# Altium PCB robotShield.PcbDoc
Units mm, origin at the board's own origin, x right, y up, seen from the top; angles counter-clockwise.
Board outline 76.26 x 60.13 mm, 2 copper layers (Top Layer, Bottom Layer); 85 components, 59 nets, 312 pads, 62 vias.
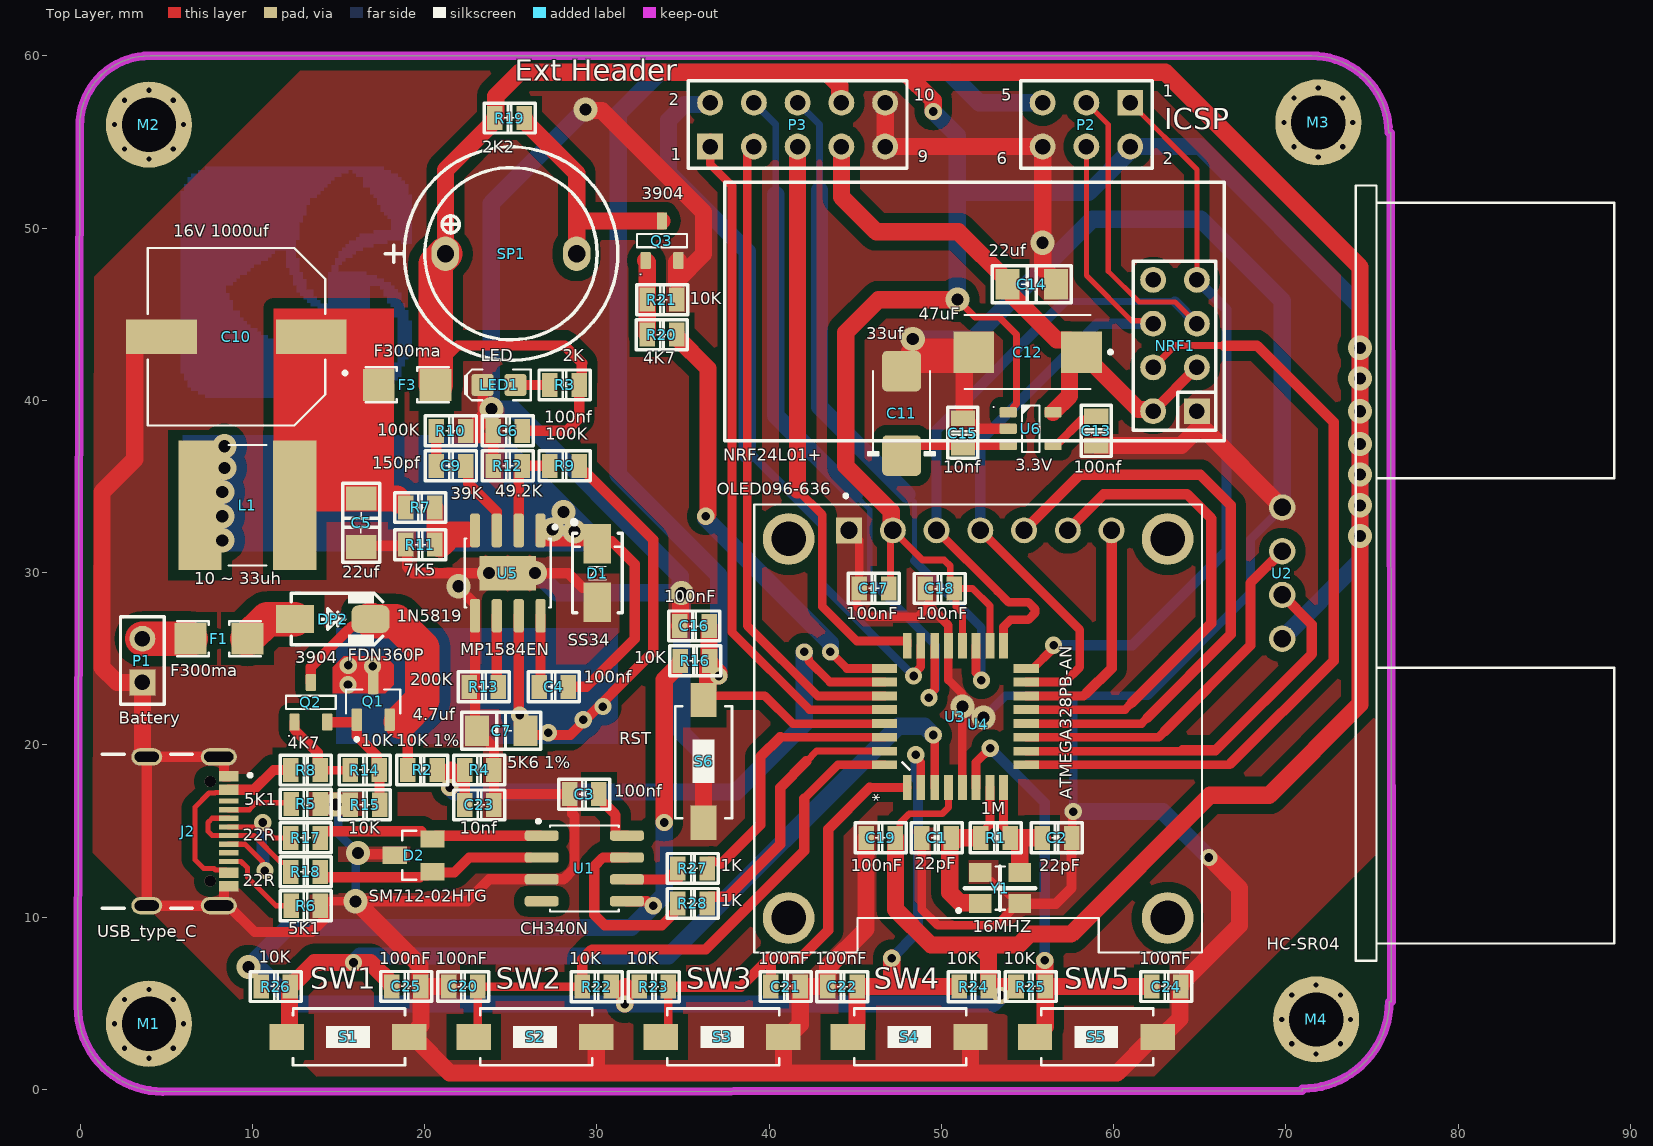
[diagram p0: Top Layer view]
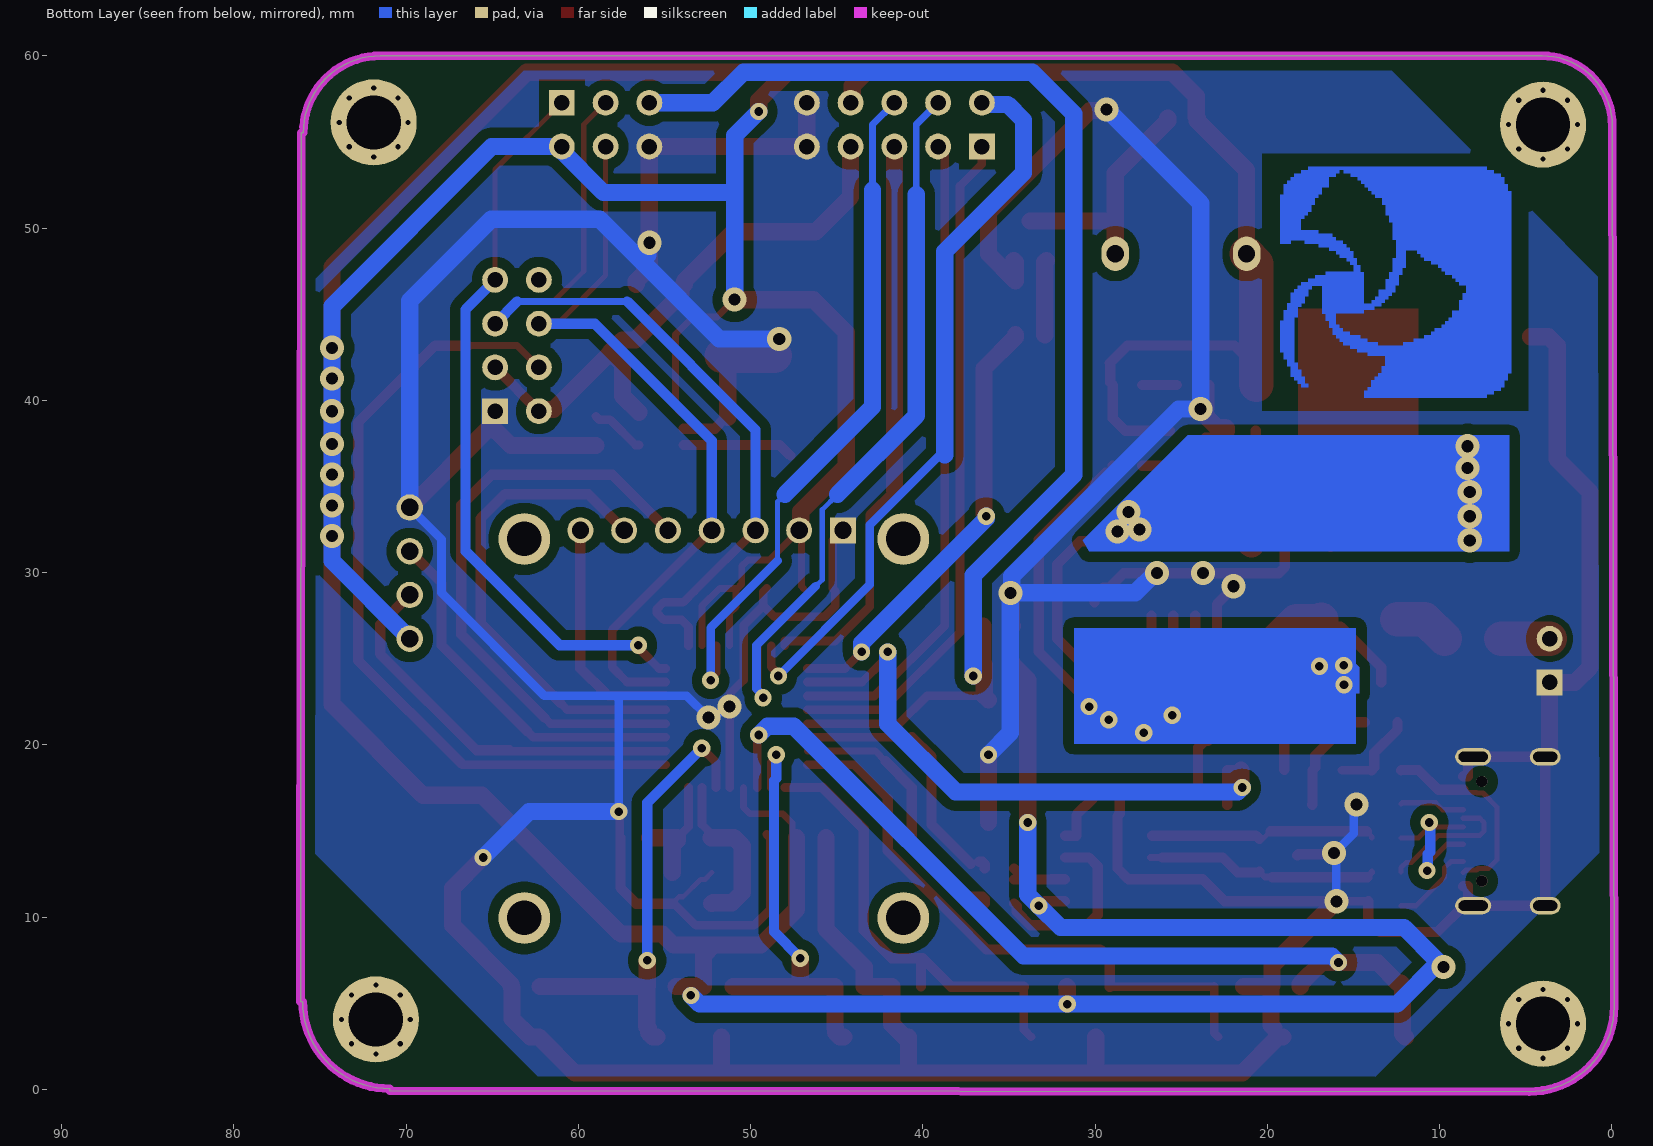
[diagram p1: Bottom Layer view, seen from below]

## Layer stack, top to bottom
Top Solder: solder mask 0.0102, Solder Resist, Dk 3.5
Top Layer: signal copper 0.0356
Dielectric 1: dielectric 0.32, FR-4, Dk 4.8
Bottom Layer: signal copper 0.0356
Bottom Solder: solder mask 0.0102, Solder Resist, Dk 3.5

## Board outline
-0.129,4.811 -0.017,55.936 cw(c4.049,55.936) 4.049,60.002 71.502,60.002 cw(c71.502,55.538) 75.966,55.538 76.093,55.538 76.127,5.101 76,5.101 cw(c70.944,5.101) 70.944,0.045 70.944,-0.082 4.806,-0.124 cw(c4.806,4.811)

## Design rules (kind name [scope] priority, off if disabled: settings)
Clearance Clearance_1 [InNamedPolygon('GND_L01_P001') Or InNamedPolygon('GND_L02_P000')] p1: gap=0.6 ignorepadtopadclearanceinfootprint=FALSE
Clearance [All] p2: gap=0.2 ignorepadtopadclearanceinfootprint=FALSE
DiffPairsRouting [All] p1: maxlimit=0.5 minlimit=0.3 mostfreqgap=0.3 toplayer_minwidth=0.3 toplayer_maxwidth=0.5 toplayer_prefwidth=0.4 bottomlayer_minwidth=0.3 bottomlayer_maxwidth=0.5 bottomlayer_prefwidth=0.4 maxuncoupledlength=12.7
PolygonConnect PolygonConnect_1 [All vs IsNamedPolygon('GND_L01_P001') Or IsNamedPolygon('GND_L02_P000')] p1: connectstyle=Direct reliefconductorwidth=0.254 reliefentries=4 polygonreliefangle="90 Angle" airgapwidth=0.254
PolygonConnect [All] p2: connectstyle=Relief reliefconductorwidth=0.254 reliefentries=4 polygonreliefangle="90 Angle" airgapwidth=0.254
RoutingVias [All] p1: holewidth=0.7 width=1.2 viastyle="Through Hole" minholewidth=0.5 minwidth=1 maxholewidth=2 maxwidth=1.5
SolderMaskExpansion [All] p1: expansion=0.102 istentingtop=FALSE
Width [All] p1: maxlimit=2 minlimit=0.2 preferedwidth=0.4
29 further rules are at their usual default settings.

## Classes and differential pairs
component class Designator: C4 C5 C6 C7 C9 C10 C11 C12 C13 C14 C15 C23 D1 D2 DP2 F1 F2 F3 J2 L1 LED1 M1 M2 M3 M4 P1 Q1 Q2 R2 R3 R4 R5 R6 R7 R8 R9 R10 R11 R12 R13 R14 R15 R17 R18 U5 U6
component class MainPlanSchDoc: C1 C2 C3 C16 C17 C18 C19 C20 C21 C22 C24 C25 NRF1 P2 P3 Q3 R1 R16 R19 R20 R21 R22 R23 R24 R25 R26 R27 R28 S1 S2 S3 S4 S5 S6 SP1 U1 U2 U3 U4 Y1
differential pair USBD: +USBD_P -USBD_N

## Components (designator, comment, footprint, x,y, rotation, side; value= is the part's Value field where it differs from the comment)
C1 "22pF" C0805 49.721,14.607 r0 top
C2 "22pF" C0805 56.706,14.607 r180 top
C3 "100nf" C0805 29.274,17.147 r180 top
C4 "100nf" C0805 27.496,23.37 r180 top
C5 "22uf" C1206 16.32,32.895 r90 top
C6 "100nf" C0805 24.829,38.229 r0 top
C7 "4.7uf" C1206 24.448,20.83 r180 top
C9 "150pf" C0805 21.527,36.197 r0 top
C10 "16V 1000uf" CAP_SMD13*13 9.081,43.69 r180 top
C11 "33uf" CAPMP6032X280N 47.689,39.245 r90 top value=33µ
C12 "47uF" CAPMP7343X430N 55.005,42.801 r180 top
C13 "100nf" C0805 58.992,38.229 r270 top
C14 "22uf" C1206 55.245,46.736 r0 top
C15 "10nf" C0805 51.245,38.102 r90 top
C16 "100nF" C0805 35.662,26.907 r180 top
C17 "100nF" C0805 46.084,29.089 r180 top
C18 "100nF" C0805 49.911,29.083 r180 top
C19 "100nF" C0805 46.482,14.605 r180 top
C20 "100nF" C0805 22.244,5.977 r180 top
C21 "100nF" C0805 40.958,5.971 r0 top
C22 "100nF" C0805 44.26,5.971 r180 top
C23 "10nf" C0805 23.178,16.512 r0 top
C24 "100nF" C0805 63.056,5.971 r0 top
C25 "100nF" C0805 18.942,5.977 r0 top
D1 "SS34" DIOM4629X24N 30.036,29.974 r90 top
D2 "SM712-02HTG" SOT23 19.368,13.591 r90 top
DP2 "1N5819" 430X270D 14.669,27.307 r0 top
F1 "F300ma" "1206 FUSE" 8.065,26.164 r0 top
F3 "F300ma" "1206 FUSE" 18.987,40.896 r0 top
J2 "USB_type_C" USB_type_C 3.874,14.988 r270 top
L1 "10 ~ 33uh" IND_7*7 9.716,33.911 r180 top
LED1 "LED" LED-0805-K 24.321,40.896 r180 top value=Green
M1 "Screw" "Board Screw_No Silk" 4,3.81 r0 top
M2 "Screw" "Board Screw_No Silk" 4,56.007 r0 top
M3 "Screw" "Board Screw_No Silk" 71.882,56.134 r0 top
M4 "Screw" "Board Screw_No Silk" 71.755,4.064 r0 top
NRF1 "NRF24L01+" NRF24L01P 64.834,39.372 r90 top locked
P1 "Battery" HDR1X2 3.62,23.624 r90 top
P2 "ICSP" HDR2X3 60.96,57.277 r180 top
P3 "Ext Header" HDR2X5 36.576,54.737 r0 top
Q1 "FDN360P" SOT95P251X112-3N 17.016,22.525 r90 top
Q2 "3904" SOT23-3 13.399,22.474 r90 top
Q3 "3904" SOT23-3 33.782,49.269 r90 top
R1 "1M" C0805 53.15,14.607 r0 top
R2 "10K 1%" C0805 19.876,18.544 r180 top
R3 "2K" C0805 28.131,40.896 r180 top
R4 "5K6 1%" C0805 23.178,18.544 r180 top
R5 "5K1" C0805 13.105,16.572 r180 top
R6 "5K1" C0805 13.105,10.664 r180 top
R7 "39K" C0805 19.749,33.784 r180 top
R8 "4K7" C0805 13.093,18.538 r0 top
R9 "100K" C0805 28.131,36.197 r180 top
R10 "100K" C0805 21.527,38.229 r0 top
R11 "7K5" C0805 19.749,31.625 r0 top
R12 "49.2K" C0805 24.829,36.197 r0 top
R13 "200K" C0805 23.432,23.37 r0 top
R14 "10K" C0805 16.522,18.538 r0 top
R15 "10K" C0805 16.545,16.529 r180 top
R16 "10K" C0805 35.701,24.875 r0 top
R17 "22R" C0805 13.093,14.6 r0 top
R18 "22R" C0805 13.093,12.631 r0 top
R19 "2K2" C0805 24.931,56.388 r0 top
R20 "4K7" C0805 33.782,43.815 r180 top
R21 "10K" C0805 33.782,45.847 r0 top
R22 "10K" C0805 29.999,5.965 r180 top
R23 "10K" C0805 33.301,5.965 r0 top
R24 "10K" C0805 51.88,5.971 r180 top
R25 "10K" C0805 55.182,5.971 r0 top
R26 "10K" C0805 11.367,5.971 r0 top
R27 "1K" C0805 35.56,12.827 r0 top
R28 "1K" C0805 35.56,10.795 r0 top
S1 "SW1" microswitch 15.558,3.05 r180 top
S2 "SW2" microswitch 26.417,3.05 r180 top
S3 "SW3" microswitch 37.275,3.05 r180 top
S4 "SW4" microswitch 48.134,3.05 r180 top
S5 "SW5" microswitch 58.992,3.05 r180 top
S6 "RST" microswitch 36.195,19.05 r90 top
SP1 "" "BUZZER 7.62mm DC" 25.019,48.514 r0 top
U1 "CH340N" SOIC_8P_127P600X170-9N#1 29.274,12.829 r0 top
U2 "HC-SR04" XCVR_HC-SR04 69.787,29.974 r90 top
U3 "ATMEGA328PB-AN" QFP80P900X900X160-32N 50.814,21.643 r90 top
U4 "OLED096-636" OLED096-636 52.134,20.957 r0 top locked
U5 "MP1584EN" SOIC_8P_127P600X170-9N#2 24.829,29.974 r270 top
U6 "3.3V" SOT23-5 55.182,38.356 r0 top value="3.3V; 400mA"
Y1 "16MHZ" XTAL_3225 53.404,11.686 r0 top

## Footprints (in the part's own frame and the unit in brackets; to place one, negate y for a bottom-side part, rotate by r counter-clockwise, add the part's x,y. Pads: shape width x height; smd on the part's side, far side on the other; paste and mask are expansions set on the pad)
430X270D [mm] "SMA Molded Diode, 2-Leads, Body 4.3x2.7mm"
  rect 2.2x1.6 smd: 1(-2.2,0)
  rrect50% 2.2x1.6 smd: 2(2.2,0)
  silkscreen extent -2.4,-1.5 2.9,1.5, body extent -2.75,-1.4 2.75,1.4, height 2.6
"1206 FUSE" [mm] "Fast Acting Smd 1206 non-Resettable Fuse Chip For Pcb Board-Design:Abbas Basereh"
  rect 1.85x1.85 smd: 1(-1.65,0) 2(1.65,0)
  silkscreen extent -2.41,-1.02 2.41,1.02, body extent -1.6,-0.8 1.6,0.8, height 1
"Board Screw_No Silk" [mm]
  round 0.6 hole 0.3: S(-2,0) S(-1.414,-1.414) S(-1.414,1.414) S(0,-2) S(0,2) S(1.414,-1.414) S(1.414,1.414) S(2,0)
  round 5 hole 3.15 mask+0.1: S(0,0)
"BUZZER 7.62mm DC" [mm] "BUZZER 12mm DIA , 7.62mm pitch DESIGNER ABBAS BASEREH"
  oval 1.6x2 hole 1: 1(-3.81,0) 2(3.81,0)
  silkscreen extent -7.3,-6.2 6.2,6.2, body extent -6,-6 6,6, height 9.5
C0805 [mm]
  rect 0.9x1.4 smd mask+0.05: 1(-0.85,0) 2(0.85,0)
  silkscreen extent -1.47,-0.87 1.49,0.88, body extent -1.1,-0.7 1.1,0.7, height 1.35
C1206 [mm]
  rect 1.4x1.78 smd mask+0.05: 1(-1.4,0) 2(1.4,0)
  silkscreen extent -2.3,-1.07 2.3,1.07, body extent -1.7,-0.9 1.7,0.9, height 1.8
CAP_SMD13*13 [mm]
  rect 4.1x2 smd: 1(-4.35,0) 2(4.35,0)
  silkscreen extent -6.4,-5.15 5.15,5.15, body extent -5.85,-5.15 5.85,5.15, height 10.24
CAPMP6032X280N [mm] "Capacitor, polarized, Molded Body, EIA 535BAAC size C; 6.00mm L X 3.20mm W X 2.80mm H"
  round 0.508 on Mech15: 0(0,0)
  rrect25% 2.35x2.25 smd: 1(-2.45,0) 2(2.45,0)
  silkscreen extent -2.45,-1.95 2.45,1.95, body extent -3,-1.6 3,1.6, height 2.8
CAPMP7343X430N [mm]
  rect 2.37x2.41 smd: 1(-3.125,0) 2(3.125,0)
  silkscreen extent -4.91,-2.15 3.65,2.15, body extent -3.65,-2.15 3.65,2.15, height 4.3
DIOM4629X24N [mm] "Molded Diode, 2-Leads, Body 4/60x2/90mm, IPC Medium Density-Design:Abbas Basereh"
  rect 2.3x1.6 smd: 1(-1.7,0) 2(1.7,0)
  silkscreen extent -2.3,-1.45 3.07,1.47, body extent -2.5,-1.22 2.5,1.48, height 2.2
HDR1X2 [mm] "Connector; Header; 2 Position"
  rect 1.5x1.5 hole 0.9: 1(0,0)
  round 1.5 hole 0.9: 2(2.54,0)
  silkscreen extent -1.27,-1.27 3.81,1.27, body extent -1.27,-1.28 3.81,1.26, height 8.79
HDR2X3 [mm] "Connector; Header; 3x2 Position"
  rect 1.5x1.5 hole 0.9: 1(0,0)
  round 1.5 hole 0.9: 2(0,2.54) 3(2.54,0) 4(2.54,2.54) 5(5.08,0) 6(5.08,2.54)
  silkscreen extent -1.27,-1.27 6.35,3.81, body extent -1.27,-1.26 6.35,3.82, height 8.38
HDR2X5 [mm] "Connector; Header; 5x2 Position"
  rect 1.5x1.5 hole 0.9: 1(0,0)
  round 1.5 hole 0.9: 2(0,2.54) 3(2.54,0) 4(2.54,2.54) 5(5.08,0) 6(5.08,2.54) 7(7.62,0) 8(7.62,2.54) 9(10.16,0) 10(10.16,2.54)
  silkscreen extent -1.27,-1.27 11.43,3.81
IND_7*7 [mm]
  rect 2.5x7.5 smd mask+0.05: 1(-2.75,0) 2(2.75,0)
  silkscreen extent -1.1,-3.5 1.1,3.5, body extent -3.87,-3.5 3.87,3.5, height 4.9
LED-0805-K [mil]
  round 20 on Mech15: 0(0,0)
  rrect25% 50x50 smd: A(-37.5,0) K(37.5,0)
  Top Layer pour cut-out: -15,30 15,30 15,-30 -15,-30
  silkscreen extent -72,-35 77,35, body extent -39,-25 39,25, height 31
microswitch [mm]
  rect 2x1.5 smd: 1(-3.556,0) 2(-3.556,0) 3(3.556,0) 4(3.556,0)
  silkscreen extent -3.31,-1.65 3.19,1.65, body extent -4.08,-1.83 3.92,1.87, height 2.5
NRF24L01P [mm] "NRFL01+ Module"
  rect 1.5x1.5 hole 0.9: 1(0,0)
  round 1.5 hole 0.9: 2(0,2.54) 3(2.54,0) 4(2.54,2.54) 5(5.08,0) 6(5.08,2.54) 7(7.62,0) 8(7.62,2.54)
  silkscreen extent -1.72,-1.59 13.28,27.41, body extent -1.72,-1.59 13.28,27.41, height 15.5
OLED096-636 [mm]
  rect 1.508x1.508 / inner round 1.508 / far side rect 1.508x1.508 hole 1: 1(-7.493,11.5)
  round 1.508 hole 1: 2(-4.953,11.5) 3(-2.413,11.5) 4(0.127,11.5) 5(2.667,11.5) 6(5.207,11.5) 7(7.747,11.5)
  round 3 hole 2: S1(-11,11) S2(11,11) S3(11,-11) S4(-11,-11)
  silkscreen extent -13,-13 13,13.6, body extent -13,-13 13,13, height 7.66
QFP80P900X900X160-32N [mil]
  rect 58x20 smd: 1(-162,110) 2(-162,79) 3(-162,47) 4(-162,16) 5(-162,-16) 6(-162,-47) 7(-162,-79) 8(-162,-110) 17(162,-110) 18(162,-79) 19(162,-47) 20(162,-16) 21(162,16) 22(162,47) 23(162,79) 24(162,110)
  rect 20x58 smd: 9(-110,-162) 10(-79,-162) 11(-47,-162) 12(-16,-162) 13(16,-162) 14(47,-162) 15(79,-162) 16(110,-162) 25(110,162) 26(79,162) 27(47,162) 28(16,162) 29(-16,162) 30(-47,162) 31(-79,162) 32(-110,162)
  silkscreen extent -121,105 -105,121, body extent -177,-177 177,177, height 63
SOIC_8P_127P600X170-9N#1 [mm]
  rrect54% 1.97x0.6 smd: 1(-2.475,1.905) 2(-2.475,0.635) 3(-2.475,-0.635) 4(-2.475,-1.905) 5(2.475,-1.905) 6(2.475,-0.635) 7(2.475,0.635) 8(2.475,1.905)
  silkscreen extent -2.77,-2.5 2,2.84, body extent -3,-2.45 3,2.45, height 1.7
SOIC_8P_127P600X170-9N#2 [mm]
  rrect54% 1.97x0.6 smd: 1(-2.475,1.905) 2(-2.475,0.635) 3(-2.475,-0.635) 4(-2.475,-1.905) 5(2.475,-1.905) 6(2.475,-0.635) 7(2.475,0.635) 8(2.475,1.905)
  rect 2x3.3 smd paste-3: 9(0,0)
  silkscreen extent -2.77,-2.5 2,2.84, body extent -3,-2.45 3,2.45, height 1.7
SOT23 [mm]
  rect 1x1.4 smd: 1(-0.95,-1.1) 2(0.95,-1.1) 3(0,1.1)
  silkscreen extent -1.42,-0.15 1.42,0.66, body extent -1.46,-1.31 1.46,1.06, height 1.12
SOT23-3 [mm] "SOT23, 3 pin"
  round 0.5 on Mech15: 0(0,0)
  rrect25% 1x0.6 smd: 1(-1.15,0.95) 2(-1.15,-0.95) 3(1.15,0)
  silkscreen extent -0.38,-1.45 0.38,1.45, body extent -1.4,-1.45 1.4,1.45, height 1.29
SOT23-5 [mm]
  round 0.5 on Mech15: 0(0,0)
  rrect25% 1x0.6 smd: 1(-1.3,0.95) 2(-1.3,0) 3(-1.3,-0.95) 4(1.3,-0.95) 5(1.3,0.95)
  silkscreen extent -0.51,-1.35 0.51,1.35, body extent -1.4,-1.45 1.4,1.45, height 1.44
SOT95P251X112-3N [mm]
  rrect25% 1.3x0.61 smd: 1(-1.06,0.95) 2(-1.06,-0.95) 3(1.06,0)
  silkscreen extent -2.3,-1.58 0.7,1.58, body extent -1.25,-1.46 1.26,1.46, height 1.12
USB_type_C [mm]
  rect 0.6x1.15 smd mask+0.05: A1_B12(-3.2,4.755) A4_B9(-2.4,4.755) B1_A12(3.2,4.755) B4_A9(2.4,4.755)
  rect 0.3x1.15 smd mask+0.05: A5(-1.25,4.755) A6(-0.25,4.755) A7(0.25,4.755) A8(1.25,4.755) B5(1.75,4.755) B6(0.75,4.755) B7(-0.75,4.755) B8(-1.75,4.755)
  oval 1x2.1 hole 0.6 slot 1.7 at 90 deg: SH1(-4.32,4.18) SH2(4.32,4.18)
  oval 1x1.8 hole 0.6 slot 1.4 at 90 deg: SH3(-4.32,0) SH4(4.32,0)
  round 0.65 hole 0.65 unplated: ""(-2.89,3.68) ""(2.89,3.68)
  silkscreen extent -4.47,-2.6 4.47,6.1, body extent -4.47,-2.6 4.47,5.11, height 3.31
XCVR_HC-SR04 [mm]
  round 1.53 hole 1.02: 1(-3.81,0) 2(-1.27,0) 3(1.27,0) 4(3.81,0)
  silkscreen extent -22.5,-19.27 22.5,-4.27, body extent -22.47,-17.53 22.53,0.28, height 25
XTAL_3225 [mm]
  rect 1.3x1.1 smd: 1(-1.15,-0.9) 2(1.15,-0.9) 3(1.15,0.9) 4(-1.15,0.9)
  silkscreen extent -2.5,-1.4 2.05,1.25, body extent -1.6,-1.25 1.6,1.25, height 0.8

## Part data
C1 C2 C3 C6 C13 C14 C15 C16 C17 C18 C19 C20 C21 C22 C23 C24 C25: library part Cap-Bipolar, "Bipolar Capacitor", Voltage=100V, Adding Date=1387/12/20, designer="Saeid Jorablo", Organazation=ControTec
C4 C9: library part "CAP SMD 0805", "CAP 0805", Data=16-12-2016, Desc.="CAP SMD 0805", designer="Abbas Basereh"
C5 C7: library part "CAP SMD 1206", "CAP 1206", Data=16-12-2016, Desc.="CAP SMD 1206", designer="Abbas Basereh"
C10: library part CAP_SMD13*13, "CAP ALUM 470UF 20% 35V SMD", Package="RADIAL-2 Panasonic", Availability="In Stock", Check_prices=https://www.snapeda.com/parts/EEE-FN1V471UP/Panasonic/view-part/6178317/?ref=eda, MF="Panasonic Electronic Components", MP=EEE-FN1V471UP, Price=None, SnapEDA_Link=https://www.snapeda.com/parts/EEE-FN1V471UP/Panasonic/view-part/6178317/?ref=snap
C11: library part CAPT_33u_3216_6V3, "Capacitor SMD Tantalum 33uF 10% 6.3V 3216-18", Manufacturer 1=Kemet, Manufacturer 2="AVX Corporation", Manufacturer 3="Vishay Sprague", Manufacturer 4="Samsung Electro-Mechanics", Manufacturer Part Number 1=T491A336K006AT, Manufacturer Part Number 2=TAJA336K006RNJ, Manufacturer Part Number 3=293D336X96R3A2TE3, Manufacturer Part Number 4=TCSCS0J336KAAR, Package / Case="EIA 535BAAC size A", Ratings=6.3V, Supplier Part Number 1=399-9716-1-ND, Tolerance=±10%, ComponentLink1Description=http://capacitoredge.kemet.com/capedge2/DataSheet?pn=T491A336K006AT, ComponentLink1URL=http://capacitoredge.kemet.com/capedge2/DataSheet?pn=T491A336K006AT, ComponentLink2Description=http://www.avx.com/docs/Catalogs/tcj.pdf, ComponentLink2URL=http://www.avx.com/docs/Catalogs/tcj.pdf, ComponentLink3Description=http://www.vishay.com/doc?40002, ComponentLink3URL=http://www.vishay.com/doc?40002, ComponentLink4Description=http://components.arrow.com/partservice/dataview/altium/51540102S9917798N4139?apiKey=aa438727d59eed98c4bed826d8d949c84cb5e685b92bf87346a0226bd2658797, ComponentLink4URL=http://components.arrow.com/partservice/dataview/altium/51540102S9917798N4139?apiKey=aa438727d59eed98c4bed826d8d949c84cb5e685b92bf87346a0226bd2658797, Material="Solid Tantalum", SCDType=source, Supplier 1=Digi-Key, Supplier 2=Digi-Key, Supplier 3=Digi-Key, Supplier 4=Arrow, Supplier Part Number 2=478-1666-1-ND, Supplier Part Number 3=293D336X96R3A2TE3-ND, Supplier Part Number 4=51540102S9917798N4139
C12: library part T541X107M025AH6510, "Cap, Tant, 470uf, 10v, Case x", Package="SMD-2 KEMET", Availability="In Stock", Check_prices=https://www.snapeda.com/parts/T541X107M025AH6510/KEMET/view-part/?ref=eda, MF=KEMET, MP=T541X107M025AH6510, Price=None, Purchase-URL=https://pricing.snapeda.com/search/part/T541X107M025AH6510/?ref=eda, SnapEDA_Link=https://www.snapeda.com/parts/T541X107M025AH6510/KEMET/view-part/?ref=snap
D1: library part "1n4007 SMD M7", "Standard Rectifiers", Manufacturer="DC COMPONENTS", Data=16-12-2016, designer="Abbas Basereh", Link=http://www.tme.eu/en/details/m7/smd-universal-diodes/dc-components/, Part. No=M7
D2: "TVS Diode, SM712 Series, 31V Clamp, 600W Peak Pulse, Surface Mount, SOT23-3", Package="TO-236 Littelfuse", Check_prices=https://www.snapeda.com/parts/SM712-02HTG/Ersa/view-part/?ref=eda, MF=Littelfuse, MP=SM712-02HTG, SnapEDA_Link=https://www.snapeda.com/parts/SM712-02HTG/Ersa/view-part/?ref=snap
DP2: "Schottkey Rectifiers", Data=16-12-2016, designer="Abbas Basereh"
F1 F3: library part "Fuse SMD1206", "SMD Fuses 1206", Data=16-12-2016, Desc.="SMD Fuses 1206", designer="Abbas Basereh"
J2: Package=None, Availability=Unavailable, MF="{'manufacturer': u'GCT'}", MP=USB4105-GF-A, Price=None
L1: library part "Inductor 100uh", "100ÂµH Shielded Wirewound Inductor 1.96A 163mOhm Nonstandard", Package="Nonstandard Eaton", Availability=Unavailable, MF=Eaton, MP=DR127-101-R, Price=None, SnapEDA_Link=https://www.snapeda.com/parts/DR127-101-R/Eaton/view-part/2755655/?ref=snap
LED1: library part LED_SMD_Green_0805_6mcd, "LED, 0805 SMD, Green", Color=Green, Manufacturer 1=LITE-ON, Manufacturer Part Number 1=LTST-C171GKT, Package / Case=0805, Ratings="6 mcd; 569 nm", Supplier Part Number 1=160-1423-1-ND, Material=GaP, SCDType=source, Supplier 1=Digi-Key
M1 M2 M3 M4: library part "Board Screw", "Board Screw With Spacer"
NRF1: library part NRF24L01P, "RF Module", Ali Hafizi=Creature
P1: library part "Header 2", "Header, 2-Pin", LatestRevisionDate=17-Jul-2002, LatestRevisionNote="Re-released for DXP Platform.", Publisher="Altium Limited"
P2: library part "Header 3X2", "Header, 3-Pin, Dual row", LatestRevisionDate=17-Jul-2002, LatestRevisionNote="Re-released for DXP Platform.", Publisher="Altium Limited"
P3: library part "Header 5X2", "Header, 5-Pin, Dual row", LatestRevisionDate=17-Jul-2002, LatestRevisionNote="Re-released for DXP Platform.", Publisher="Altium Limited"
Q1: "P-Channel 30V 2A (Ta) 500mW (Ta) Surface Mount SuperSOT-3", Package="TO-236-3 ON", Availability="In Stock", Check_prices=https://www.snapeda.com/parts/FDN360P/Onsemi/view-part/?ref=eda, MF=ON, MP=FDN360P, Price=None, Purchase-URL=https://pricing.snapeda.com/search/part/FDN360P/?ref=eda, SnapEDA_Link=https://www.snapeda.com/parts/FDN360P/Onsemi/view-part/?ref=snap
Q2 Q3: library part NPN_MMBT3904, "Transistor SMD NPN 40V 0.2A 250mW SOT-23", Manufacturer 1="Fairchild Semiconductor", Manufacturer 2="NXP Semiconductors", Manufacturer Part Number 2=PMBT3904,215, Package / Case=SOT-23, Ratings="40V; 200mA; 250mW", Supplier Part Number 1=MMBT3904FSCT-ND, ComponentLink1Description=http://www.fairchildsemi.com/ds/MM/MMBT3904.pdf, ComponentLink1URL=http://www.fairchildsemi.com/ds/MM/MMBT3904.pdf, ComponentLink2Description=http://www.nxp.com/documents/data_sheet/PMBT3904.pdf, ComponentLink2URL=http://www.nxp.com/documents/data_sheet/PMBT3904.pdf, Manufacturer Part Number 1=3904, Material=Si, Mounting Type="Surface Mount", SCDType=source, Supplier 1=Digi-Key, Supplier 2=Digi-Key, Supplier Part Number 2=568-1741-1-ND, Transistor Type=NPN
R1 R5 R6 R16 R17 R18 R19 R22 R23 R24 R25 R26 R27 R28: library part Resistor, "Resistor"
R2 R4: library part "RES 1206 0.25W", "RES 1206", Data=16-12-2016, Desc.="RES SMD 1206", designer="Abbas Basereh"
R3 R7 R8 R9 R10 R11 R12 R13 R14 R15 R20 R21: library part RES_0R_0805, "Resistor SMD 0805", Manufacturer 1="Samsung Electro-Mechanics America, Inc", Manufacturer 2="Stackpole Electronics Inc", Manufacturer 3=Yageo, Manufacturer 4="Panasonic Electronic Components", Manufacturer 5="Rohm Semiconductor", Manufacturer Part Number 1=RC2012J000CS, Manufacturer Part Number 2=RMCF0805ZT0R00, Manufacturer Part Number 3=RC0805JR-070RL, Manufacturer Part Number 4=ERJ-6GEY0R00V, Manufacturer Part Number 5=MCR10ERTJ000, Package / Case="0805 (2012 metric)", Ratings=1/8W, Supplier Part Number 1=1276-5466-6-ND, Tolerance=N/A, ComponentLink1Description=http://www.samsungsem.com/servlet/FileDownload?filename=productcatalog/pdf/Chip_Resistor.pdf, ComponentLink1URL=http://www.samsungsem.com/servlet/FileDownload?filename=productcatalog/pdf/Chip_Resistor.pdf, ComponentLink2Description=http://www.seielect.com/Catalog/SEI-RMCF_RMCP.pdf, ComponentLink2URL=http://www.seielect.com/Catalog/SEI-RMCF_RMCP.pdf, ComponentLink3Description=http://media.digikey.com/pdf/Data%20Sheets/Yageo%20PDFs/RC0805%20Pb%20Free.pdf, ComponentLink3URL=http://media.digikey.com/pdf/Data%20Sheets/Yageo%20PDFs/RC0805%20Pb%20Free.pdf, ComponentLink4Description=http://industrial.panasonic.com/www-cgi/jvcr13pz.cgi?E+PZ+3+AOA0001+ERJ6GEY0R00V+7+WW, ComponentLink4URL=http://industrial.panasonic.com/www-cgi/jvcr13pz.cgi?E+PZ+3+AOA0001+ERJ6GEY0R00V+7+WW, ComponentLink5Description=http://rohmfs.rohm.com/en/products/databook/datasheet/passive/resistor/chip_resistor/mcr_g.pdf, ComponentLink5URL=http://rohmfs.rohm.com/en/products/databook/datasheet/passive/resistor/chip_resistor/mcr_g.pdf, RoHS 1="RoHS Compliant", RoHS 2="RoHS Compliant", RoHS 3="RoHS Compliant", RoHS 4="RoHS Compliant", RoHS 5="RoHS Compliant", SCDType=spec, Supplier 1=Digi-Key, Supplier 2=Digi-Key, Supplier 3=Digi-Key, Supplier 4=Digi-Key, Supplier 5=Digi-Key, Supplier Part Number 2=RMCF0805ZT0R00DKR-ND, Supplier Part Number 3=311-0.0ARDKR-ND, Supplier Part Number 4=P0.0ADKR-ND, Supplier Part Number 5=RHM0.0CPDKR-ND
S1 S2 S3 S4 S5 S6: library part Switch_Push_Button, "Tactile Switch SPST-NO Top Actuated Surface Mount", Package="Tactile Switch CK", Availability="In Stock", Check_prices=https://www.snapeda.com/parts/PTS525SM15SMTR2%20LFS/C%2526K/view-part/?ref=eda, MF=C&K, MP="PTS525SM15SMTR2 LFS", Price=None, Purchase-URL="https://pricing.snapeda.com/search/part/PTS525SM15SMTR2 LFS/?ref=eda", SnapEDA_Link=https://www.snapeda.com/parts/PTS525SM15SMTR2%20LFS/C%2526K/view-part/?ref=snap
SP1: library part "PIEZO BUZZER", "PIEZO BUZZER ACTIVE", Comment_1="SPEAKER AND BEEP", ComponentLink2Description=Reference, Design Date=1395/11/14, designer="Abbas Basereh", Mounting Technology=THD, PackageDescription=THD, Pin Count=2, Publisher="Abbas Basereh", Status=Unreleased
U1: "USB to Serial Port Chip", Package=Package, Check_prices=https://www.snapeda.com/parts/CH340N/WCH/view-part/?ref=eda, MF=WCH, MP=CH340N, SnapEDA_Link=https://www.snapeda.com/parts/CH340N/WCH/view-part/?ref=snap
U2: "Ultrasonic Sensor Module", Package=None, Availability=Unavailable, MP=HC-SR04, Price=None
U3: "AVR AVRÂ® ATmega, Functional Safety (FuSa) Microcontroller IC 8-Bit 20MHz 32KB (16K x 16) FLASH 32-TQFP (7x7)", Package=None, Check_prices=https://www.snapeda.com/parts/ATMEGA328PBAN/Microchip+Technology/view-part/?ref=eda, MF="Microchip Technology", MP=ATMEGA328PBAN, SnapEDA_Link=https://www.snapeda.com/parts/ATMEGA328PBAN/Microchip+Technology/view-part/?ref=snap
U4: "0.96 128 X 64 MONOCHROME GRAPHIC OLED DISPLAY MODULE - SPI- I2C", Package=Package, Check_prices=https://www.snapeda.com/parts/DM-OLED096-636/Display+Module/view-part/?ref=eda, MF="Display Module", MP=DM-OLED096-636, SnapEDA_Link=https://www.snapeda.com/parts/DM-OLED096-636/Display+Module/view-part/?ref=snap
U5: "Buck Switching Regulator IC Positive Adjustable 0.8V 1 Output 3A 8-SOIC _0.154, 3.90mm Width_ Exposed Pad", Package="SOIC-8 Monolithic Power", Availability=Unavailable, MF="Monolithic Power", MP=MP1584EN, Price=None, SnapEDA_Link=https://www.snapeda.com/parts/MP1584EN/Monolithic%20Power%20Systems%20Inc./view-part/891721/?ref=snap
U6: library part LinREG_3V3_400mA_TPS73633DBV, "IC LDO Regulator 3.3V 400mA SOT23-5 SMD", Current - Limit (Min)=400mA, Current - Output="400mA (Max)", Manufacturer 1="Texas Instruments", Manufacturer Part Number 1=TPS73633DBVT, Package / Case=SOT23-5, Ratings="5.5Vin Max", Supplier Part Number 1=296-15819-1-ND, Tolerance=±0.5%, Voltage - Dropout (Typical)="0.075V @ 400mA", Voltage - Input="3.5V to 5.5V", Voltage Regulator Type="Switching Buck", ComponentLink1Description=http://www.ti.com/lit/ds/symlink/tps73601.pdf, ComponentLink1URL=http://www.ti.com/lit/ds/symlink/tps73601.pdf, Regulator Topology="Positive Fixed", SCDType=spec, Supplier 1=Digi-Key, Voltage - Output=3.3V
Y1: library part "Crystal 3225", "Crystals 25.0000MHZ 6PF SMD ECX-33B2 +/-2 ppm Aging 3225 4-SMD RoHS", Package="ECS-33B2-33B2-4 ECS", Check_prices=https://www.snapeda.com/parts/ECS-250-6-33B2-CTN-TR3/ECS/view-part/?ref=eda, MF=ECS, MP=ECS-250-6-33B2-CTN-TR3, SnapEDA_Link=https://www.snapeda.com/parts/ECS-250-6-33B2-CTN-TR3/ECS/view-part/?ref=snap

## Via types
v1: diameter 1, hole 0.5, Top Layer to Bottom Layer, tented both sides, 31 vias
v2: diameter 1.4, hole 0.7, Top Layer to Bottom Layer, tented both sides, 30 vias
v3: diameter 1, hole 0.5, Top Layer to Bottom Layer, 1 vias

## Nets (pads, with @x,y where several pads share a name; then routed paths per layer and width w, separated by ;. In a path a pad name is that pad's centre, name@x,y a point inside that pad or via, vN(x,y) a via of type N, cw(c..) or ccw(c..) an arc to the next point about the centre after c; other vN are vias at no path point)
+3v3: C12.1 C14.1 NRF1.2 NRF1.3 P3.7 U6.5 | length 34.3
  Top Layer w0.6: NRF1.2 NRF1.3
  Top Layer w1: P3.7 44.196,51.816 46.228,49.784 50.987,49.784 53.845,46.926 C14.1 54.045,46.536 54.045,46.158 56.697,43.506 57.445,43.506 58.13,42.821 C12.1 ; U6.5 57.445,40.269 57.445,42.116 C12.1 ; NRF1.2 62.199,39.468 61.444,39.468 58.13,42.781 C12.1
+5v: C6.2 C17.1 C18.1 C19.1 F3.2 P2.2 P3.8 R3.1 R16.1 R19.1 R22.1 R23.1 R24.1 R25.1 R26.1 SP1.1 U1.5 U2.1 U3.4 U3.18 U3.20 U4.2 U6.1 | length 361.1
  Top Layer w0.4: C17.1 47.058,29.213 47.058,32.334 U4.2 48.905,30.734 50.165,30.734 50.516,30.383 50.516,29.328 C18.1 ; C19.1 47.582,14.855 47.582,15.451 48.133,16.002 50.038,16.002 50.407,16.371 U3.4 ; v2(50.927,45.847) 51.943,44.831 53.34,44.831 54.356,43.815 54.356,39.78 54.182,39.606 54.182,39.406 54.082,39.306 U6.1 ; U3.20 51.22,27.647 50.85,28.017 50.85,28.994 C18.1 ; U3.18 52.82,28.079 51.816,29.083 C18.1
  Top Layer w0.6: 21.262,42.536 21.908,43.182 28.131,43.182 29.147,42.166 29.131,42.15 29.131,41.046 R3.1 28.981,38.952 28.258,38.229 C6.2 ; U1.5 v1@32.909,10.924
  Top Layer w1: SP1.1 21.209,53.366 24.081,56.238 R19.1 24.131,56.438 24.131,57.656 25.527,59.052 43.31,59.052 ; v1(31.623,4.953) 31.623,5.938 31.65,5.965 ; v1(33.909,15.494) 33.909,23.783 34.851,24.725 R16.1 ; P3.8 44.1,57.373 44.1,58.262 43.31,59.052 ; U4.2 47.091,32.548 47.091,33.554 44.45,36.195 44.45,43.942 46.355,45.847 v2(50.927,45.847) ; C19.1 47.332,10.453 49.403,8.382 52.145,8.382 ; v1(49.53,56.769) 49.53,57.404 47.882,59.052 ; v1(53.467,5.461) 53.467,5.907 53.531,5.971 R25.1 ; 53.467,5.971 R24.1 52.73,7.796 52.145,8.382 ; 43.31,59.052 47.882,59.052 ; 47.882,59.052 62.992,59.052 74.295,47.749 74.295,22.352 69.025,17.082 65.596,17.082 57.531,9.017 55.118,9.017 54.483,8.382 52.145,8.382
  Top Layer w2: F3.2 20.637,47.942 SP1.1
  Bottom Layer w1: v1(33.909,15.494) 33.909,11.303 v1(33.274,10.668) 32.004,9.398 12.065,9.398 10.05,7.383 12.48,4.953 v1(31.623,4.953) 52.959,4.953 v1(53.467,5.461) ; v1(49.53,56.769) 50.927,55.372 50.927,52.07 ; v2(50.927,45.847) 50.927,52.07 ; P2.2 65.024,54.737 74.295,45.466 74.295,30.672 U2.1 ; P2.2@61.087,54.61 58.547,52.07 50.927,52.07
  other v2: 9.779,7.112 74.295,32.131 74.295,33.909 74.295,35.687 74.295,37.465 74.295,39.37 74.295,41.275 74.295,43.053
+5vUSB: J2.A4_B9 J2.B4_A9 R8.1 | length 11.8
  Top Layer w0.3: J2.B4_A9 8.479,12.738 7.869,12.738 7.778,12.829 7.176,12.829 6.668,13.337 6.668,16.385 7.486,17.203 7.834,17.203 7.869,17.238 8.479,17.238 J2.A4_B9
  Top Layer w0.6: J2.A4_B9 10.084,17.388 11.24,18.544 12.237,18.544 R8.1
+12V: DP2.2 Q1.2 Q2.3 R2.2 | length 17
  Top Layer w0.6: Q2.3 13.399,24.513 15.755,26.869 16.458,26.869 DP2.2@16.869,27.28 ; 18.606,21.338 19.026,20.918 R2.2
  Top Layer w2: DP2.2@16.869,27.28 16.969,27.18 18.324,27.18 19.876,25.628 19.876,22.608 18.606,21.338
+12V_Bat: DP2.1 F1.2 | length 3.2
  Top Layer w2: F1.2 10.858,27.307 DP2.1
Buzzer: R20.1 U3.25 | length 25.8
  Top Layer w0.5: v1(43.561,25.4) 44.524,24.437 U3.25
  Top Layer w1: R20.1 34.632,43.665 36.449,41.848 36.449,33.401 v1(36.322,33.274)
  Bottom Layer w1: v1(36.322,33.274) 36.322,33.147 43.561,25.908 v1(43.561,25.4)
CS_nRF: NRF1.4 U3.9 | length 47
  Top Layer w0.4: NRF1.4 63.562,43.18 66.421,43.18 ; 66.728,18.849 66.802,18.923
  Top Layer w0.5: U3.9 66.728,18.849
  Top Layer w0.6: 66.421,43.18 68.326,43.18 72.771,38.735 72.771,24.892 66.802,18.923
CS_OLED: U3.14 U4.7 | length 13.6
  Top Layer w0.5: U3.14 58.27,22.837 58.42,22.987
  Top Layer w0.6: 58.42,22.987 59.881,24.448 U4.7
DC_OLED: U3.13 U4.6 | length 28.7
  Top Layer w0.5: U3.13 60.658,22.05 61.087,22.479
  Top Layer w0.6: U4.6 59.428,34.544 64.262,34.544 65.659,33.147 65.659,27.051 61.087,22.479
GND: C1.1 C2.1 C3.2 C5.1 C6.1 C7.2 C10.2 C11.2 C12.2 C13.2 C14.2 C15.2 C16.2 C17.2 C18.2 C19.2 C20.2 C21.2 C22.2 C23.2 C24.2 C25.2 D1.1 D2.3 J2.A1_B12 J2.B1_A12 J2.SH1 J2.SH2 J2.SH3 J2.SH4 LED1.K NRF1.1 P1.1 P2.6 P3.9 P3.10 Q3.2 R4.1 R5.1 R6.1 R10.2 R11.1 R12.1 R13.1 R15.2 R21.2 S1.1 S1.2 S2.1 S2.2 S3.1 S3.2 S4.1 S4.2 S5.1 S5.2 S6.1 S6.2 U1.3 U2.4 U3.5 U3.21 U4.1 U5.5 U5.9 U6.2 Y1.2 Y1.4 | length 458.3
  Top Layer w0.3: Y1.4 52.654,12.186 52.917,12.186 53.917,11.186 54.154,11.186 Y1.2
  Top Layer w0.5: R6.1@14.155,10.922 v2(16.002,10.922) ; U4.1 45.234,31.865 C17.2 45.085,28.94 45.085,28.067 45.72,27.432 48.611,27.432 49.261,28.082 ; C18.2 49.261,28.883 49.261,28.082 ; C1.1@49.071,14.807 C1.1 48.871,10.438 49.784,9.525 53.193,9.525 54.454,10.786 Y1.2 ; U3.5 v2(51.22,22.225) 51.22,22.948 50.407,23.761 U3.21 50.407,26.031 50.403,26.035 50.403,26.94 49.261,28.082 ; C2.1 57.607,14.658 57.607,16.078 v1(57.658,16.129)
  Top Layer w0.6: J2.B1_A12 8.354,11.788 8.354,10.853 J2.SH2@8.17,10.668 ; J2.A1_B12 8.354,18.188 8.354,19.124 8.17,19.308 J2.SH1 J2.SH3 J2.SH4 J2.SH2 J2.SH2@8.17,10.668 ; R6.1@14.155,10.922 14.155,9.837 13.462,9.144 10.129,9.144 8.604,10.668 J2.SH2@8.17,10.668 ; v2(16.002,10.922) 22.479,10.922 23.751,12.194 U1.3 28.069,12.194 28.702,12.827 28.702,15.875 28.574,16.003 28.574,16.997 C3.2 24.155,17.147 24.029,17.274 R4.1 24.028,19.85 23.638,20.24 23.448,20.24 22.924,20.764 U5.5 22.924,28.184 21.971,29.138 v2(21.971,29.21) ; v2(16.129,13.716) 16.191,13.654 18.206,13.654 D2.3 ; C5.1 16.385,31.56 18.835,31.56 R11.1 18.987,31.537 18.987,30.326 19.339,29.974 v2(23.749,29.974) U5.9 28.336,29.974 29.186,29.124 29.536,29.124 30.036,28.624 D1.1 ; R10.2 22.378,37.979 22.528,37.829 23.579,37.829 23.979,37.428 R12.1 ; v2@23.369,39.497 LED1.K ; C15.2@51.496,38.952 52.092,38.356 U6.2 ; Y1.2 56.633,10.786 57.556,11.709 C2.1
  Top Layer w1: J2.SH3 3.62,19.308 P1.1 2.157,23.624 1.27,24.511 1.27,34.671 3.181,36.582 3.181,43.19 3.681,43.69 C10.2 ; v2(16.002,10.922) 19.742,7.182 19.742,6.027 C25.2 ; S1.1 19.364,3.05 21.462,0.952 29.972,0.952 ; S1.1@19.614,3.55 19.792,3.728 C25.2 ; C20.2 C25.2 ; R10.2 22.378,38.379 22.428,38.429 22.917,38.429 23.876,39.389 v2(23.876,39.497) ; v2(29.337,56.896) 29.414,56.819 30.303,56.819 36.195,50.927 36.195,48.496 34.632,46.933 34.632,48.019 Q3.2 ; S2.1 29.973,0.953 29.972,0.952 ; C16.2 34.862,26.957 34.862,28.766 v2(34.925,28.829) ; S6.1 v1(36.195,19.431) ; C19.2 45.632,9.31 43.41,7.088 C22.2 C21.2 41.809,3.777 41.081,3.05 S3.1 40.831,1.017 40.767,0.952 ; P3.10 P3.9 P2.6 v2(55.88,49.149) 55.88,47.691 56.645,46.926 C14.2 ; C15.2@51.323,39.002 51.323,42.244 51.675,42.596 C12.2 ; S4.1 51.69,0.953 51.689,0.952 ; C13.2 63.922,37.379 64.834,38.291 65.28,38.291 U2.4 ; v1(65.532,13.462) 67.31,11.684 67.31,9.525 63.907,6.121 C24.2 63.857,5.921 63.857,4.108 62.798,3.05 S5.1 62.298,3.05 60.2,0.952 51.689,0.952 ; 29.972,0.952 40.767,0.952 ; 40.767,0.952 51.689,0.952
  Top Layer w2: C11.2@48.59,42.596 C12.2@51.675,42.596
  Bottom Layer w0.5: v2(14.825,16.551) 14.988,16.388 14.988,14.857 16.002,13.843 v2(16.002,10.922) ; v2(51.22,22.225) 51.464,22.225 51.926,21.762 52.279,21.762 v2(52.451,21.59) 53.721,22.86 57.848,22.86 ; v1(57.658,16.129) 57.658,22.669 57.848,22.86 ; U2.4 67.945,31.942 67.945,28.829 61.976,22.86 57.848,22.86
  Bottom Layer w1: v2(26.416,29.972) 26.524,29.972 27.667,28.829 v2(34.925,28.829) ; v2(29.337,56.896) 23.876,51.435 v2(23.876,39.497) 25.146,39.497 34.848,29.795 34.848,28.906 v2(34.925,28.829) ; v1(36.195,19.431) 34.925,20.701 v2(34.925,28.829) ; v2(48.338,43.561) 51.816,43.561 56.325,48.069 ; v2(55.88,49.149) 55.957,49.072 55.957,48.437 56.325,48.069 ; v1(57.658,16.129) 62.865,16.129 v1(65.532,13.462) ; U2.4 69.787,45.783 65.057,50.513 58.768,50.513 56.325,48.069
I2C_SCL: P3.1 U3.28 | length 39.9
  Top Layer w0.5: P3.1@36.576,55.245 36.576,53.721 37.846,52.451 37.846,26.543 42.339,22.05 U3.28
I2C_SDA: P3.3 U3.27 | length 38.1
  Top Layer w0.5: P3.3@39.116,55.245 39.116,54.974 38.735,54.593 38.735,26.924 42.822,22.837 U3.27
MISO: NRF1.7 P2.1 U3.16 | length 42.9
  Top Layer w0.3: P2.1 64.834,53.403 NRF1.7
  Top Layer w0.5: U3.16 55.319,24.437 v1@56.438,25.557
  Top Layer w0.6: v1@56.438,25.557 56.438,25.704 v1(56.515,25.781)
  Bottom Layer w0.6: v1(56.515,25.781) 61.087,25.781 66.548,31.242 66.548,45.279 NRF1.7
MOSI: NRF1.6 P2.4 U3.15 U4.4 | length 44.4
  Top Layer w0.3: P2.4 58.42,47.244 61.039,44.625 62.122,44.625 NRF1.6
  Top Layer w0.5: U4.4 58.039,26.68 58.039,24.511 57.178,23.65 U3.15
  Bottom Layer w0.6: U4.4 52.261,37.656 59.057,44.452 NRF1.6
NetC3_1: C3.1 U1.8 | length 3.5
  Top Layer w0.6: C3.1 30.124,16.897 31.088,15.934 31.088,14.734 U1.8
NetC4_1: C4.1 D1.2 L1.2 U5.1 | length 16
  Top Layer w0.6: U5.1 26.734,31.818 30.036,31.818 30.86,31.818 32.195,30.482 32.195,26.164 29.402,23.37 C4.1
  other v2: 8.255,31.877 28.702,32.385 27.432,32.512 8.255,33.274 28.067,33.528 8.255,34.671 8.382,36.068 8.382,37.338
NetC4_2: C4.2 U5.8 | length 4.2
  Top Layer w0.6: C4.2 26.734,23.458 U5.8
NetC5_2: C5.2 C10.1 F3.1 L1.1 R7.2 | length 6.2
  Top Layer w1.5: L1.1 12.85,34.295 C5.2 18.388,34.295 R7.2@18.499,34.184
NetC7_1: C7.1 Q1.3 R9.1 U5.7 | length 29.7
  Top Layer w0.6: C7.1@25.464,21.214 25.604,21.353 C7.1@25.604,21.64 ; U5.7 25.464,21.78 C7.1@25.604,21.64 ; v1(25.527,21.717) C7.1@25.604,21.64 ; R9.1 28.981,35.947 29.131,35.797 29.381,35.797 33.274,31.905 33.274,25.4 28.45,20.576 27.178,20.576 26.102,20.576 25.604,21.075 C7.1@25.604,21.64
  other v1: 27.178,20.701 29.21,21.463 30.353,22.225 15.558,23.497 16.985,24.567 15.565,24.614
NetC9_1: C9.1 R10.1 | length 2
  Top Layer w0.6: C9.1 R10.1
NetC9_2: C9.2 U5.3 | length 4.5
  Top Layer w0.6: C9.2 22.528,36.047 22.528,35.197 24.194,33.53 U5.3
NetC11_1: C11.1 C15.1 U6.3 | length 6.4
  Top Layer w0.6: C11.1 48.3,37.406 U6.3
NetC13_1: C13.1 U6.4 | length 3.2
  Top Layer w0.5: U6.4 56.682,37.406 58.155,38.879 58.792,38.879 C13.1
NetF1_1: F1.1 P1.2 | length 2.8
  Top Layer w2: P1.2 F1.1
NetJ2_A5: J2.A5 R5.2 | length 3.8
  Top Layer w0.3: J2.A5 9.823,16.238 10.224,16.639 12.188,16.639 R5.2
NetJ2_B5: J2.B5 R6.2 | length 5
  Top Layer w0.3: J2.B5 9.349,13.238 9.716,12.871 9.716,12.321 11.373,10.664 R6.2
NetLED1_A: LED1.A R3.2 | length 2
  Top Layer w0.6: LED1.A R3.2
NetQ1_1: Q1.1 Q2.2 R14.2 R15.1 | length 7.3
  Top Layer w0.6: Q2.2 16.061,21.324 16.066,21.329 Q1.1 16.071,21.46 16.071,20.532 17.222,19.382 17.222,18.688 R14.2 17.384,18.527 17.384,16.541 R15.1
NetQ2_1: Q2.1 R8.2 R14.1 | length 5.1
  Top Layer w0.5: R8.2 R14.1
  Top Layer w0.6: Q2.1 12.449,20.891 13.793,19.548 13.793,18.688 R8.2
NetQ3_1: Q3.1 R20.2 R21.1 | length 4.3
  Top Layer w1: Q3.1 32.932,48.019 R20.2
NetQ3_3: Q3.3 R19.2 SP1.2 | length 14.1
  Top Layer w1: R19.2 25.781,56.238 28.829,53.19 SP1.2 SP1.2@28.956,48.641 ; 28.956,50.419 Q3.3
NetR7_1: R7.1 R11.2 U5.4 | length 3.9
  Top Layer w1: R11.2 R7.1
  Top Layer w1.5: R11.2@20.934,31.625 21.523,32.214 22.474,32.214
NetR9_2: R9.2 R12.2 U5.2 | length 5.4
  Top Layer w0.6: U5.2 25.464,35.732 25.68,35.947 R12.2 R9.2
NetR13_2: R13.2 U5.6 | length 4.2
  Top Layer w0.6: U5.6 24.194,23.458 R13.2
NetR27_1: R27.1 U1.6 | length 3.7
  Top Layer w0.6: U1.6@31.752,12.194 32.515,12.194 32.518,12.192 R27.1@34.71,12.192 ; 34.202,12.319 R27.1
NetR28_1: R28.1 U1.7 | length 10.8
  Top Layer w0.6: U1.7 30.355,13.464 29.845,12.954 29.845,10.13 30.45,9.525 33.782,9.525 34.56,10.303 34.56,10.645 R28.1
PC0: P3.2 U3.23 | length 43.1
  Top Layer w0.5: v1(48.387,24.003) 48.387,24.107 48.807,24.527 U3.23
  Bottom Layer w0.5: 38.735,36.83 39.02,36.83 43.084,32.765 43.084,29.306 v1(48.387,24.003)
  Bottom Layer w1: P3.2 36.48,57.181 35.083,57.181 34.163,56.261 34.163,53.213 38.735,48.641 38.735,36.83
PC1: P3.5 U3.24 | length 33.3
  Top Layer w0.5: 41.656,34.798 43.084,33.37 43.084,28.036 45.085,26.035 48.016,26.035 48.02,26.031 U3.24
  Top Layer w1: 41.656,34.798 P3.5
PE2: P3.6 U3.19 | length 40.1
  Top Layer w0.5: U3.19 52.007,24.201 52.324,23.884 v1(52.324,23.749)
  Bottom Layer w0.3: 48.006,34.544 48.436,34.114 48.436,30.685
  Bottom Layer w0.4: P3.6 42.926,56.007 42.926,52.197
  Bottom Layer w0.5: 48.436,30.685 52.324,26.797 v1(52.324,23.749)
  Bottom Layer w1: 42.926,52.197 42.926,39.624 48.006,34.544
PE3: P3.4 U3.22 | length 42.2
  Top Layer w0.5: v1(49.276,22.733) 49.276,22.868 49.62,23.212 U3.22
  Bottom Layer w0.3: 44.958,34.544 45.847,33.655 45.847,29.591 46.228,29.21
  Bottom Layer w0.4: P3.4 40.386,56.007 40.386,51.943
  Bottom Layer w0.5: 46.228,29.21 49.657,25.781 49.657,23.249 49.276,22.868 v1(49.276,22.733)
  Bottom Layer w1: 40.386,51.943 40.386,39.116 44.958,34.544
Power_Input_FB: C23.1 R2.1 R4.2 U3.26 | length 35.9
  Top Layer w0.5: v3(42.037,25.4) 42.037,25.265 42.291,25.011 42.291,24.892 43.533,23.65 U3.26
  Top Layer w0.6: 21.527,18.544 R4.2 C23.1
  Top Layer w1: v1(21.463,17.526) 21.527,17.59 21.527,18.544
  Bottom Layer w1: v1(21.463,17.526) 21.717,17.272 38.1,17.272 42.037,21.209 v3(42.037,25.4)
RES_OLED: U3.12 U4.5 | length 35.6
  Top Layer w0.5: U3.12 61.623,21.237 61.976,21.59
  Top Layer w0.6: U4.5 58.031,35.687 65.024,35.687 66.802,33.909 66.802,26.416 61.976,21.59
RST: C16.1 P2.5 R16.2 S6.3 S6.4 U3.29 | length 77.6
  Top Layer w0.5: S6.3@36.445,22.856 36.449,22.86 39.751,22.86 41.374,21.237 U3.29
  Top Layer w1: S6.3 36.445,22.856 R16.2@36.445,24.64 ; R16.2@36.512,24.875 C16.1 ; R16.2 36.551,24.725 37.084,24.192 v1(37.084,24.003)
  Bottom Layer w1: v1(37.084,24.003) 37.084,29.845 31.242,35.687 31.242,56.642 33.652,59.052 50.419,59.052 52.194,57.277 P2.5
RX: R28.2 U3.31 | length 16
  Top Layer w0.4: 42.164,19.05 42.751,19.637 U3.31
  Top Layer w0.6: R28.2 36.41,11.045 36.56,11.195 37.611,11.195 40.64,14.224 40.64,17.526 42.164,19.05
SCK: NRF1.5 P2.3 U3.17 U4.3 | length 52.4
  Top Layer w0.3: P2.3 59.69,56.007 59.69,47.498 61.468,45.72 63.567,45.72 NRF1.5
  Top Layer w0.5: U4.3 53.251,28.928 53.904,28.275 55.051,28.275 55.454,27.871 55.454,27.67 55.051,27.267 54.011,27.267 53.608,26.863 U3.17
  Bottom Layer w0.4: 57.172,45.742 63.544,45.742
  Bottom Layer w0.6: U4.3 49.721,38.291 57.172,45.742 ; 63.544,45.742 NRF1.5
SR04_ECHO: U2.3 U3.11 | length 21.5
  Top Layer w0.5: U3.11 62.613,20.449 62.992,20.828
  Top Layer w0.6: 62.992,20.828 67.945,25.781 67.945,29.402 U2.3
SR04_TRIG: U2.2 U3.10 | length 23
  Top Layer w0.5: U3.10 63.96,19.637 64.008,19.685
  Top Layer w0.6: 64.008,19.685 65.913,19.685 71.501,25.273 71.501,26.991 U2.2
SW1: C25.1 R26.2 S1.3 S1.4 U3.3 | length 52.8
  Top Layer w0.5: v1(49.53,20.574) 49.616,20.488 49.616,17.532 U3.3
  Top Layer w1: S1.3 12.168,3.215 12.168,5.921 R26.2 12.218,6.121 12.268,6.171 12.418,6.171 13.612,7.366 v1(15.875,7.366) 16.853,7.366 18.092,6.127 C25.1
  Bottom Layer w1: v1(15.875,7.366) 16.256,7.747 34.163,7.747 47.498,21.082 49.022,21.082 v1(49.53,20.574)
SW2: C20.1 R22.2 S2.3 S2.4 U3.32 | length 34.7
  Top Layer w0.5: S2.3 23.094,3.283 C20.1 23.1,5.971 29.143,5.971 R22.2 ; 42.037,16.891 43.995,18.849 U3.32
  Top Layer w0.6: R22.2 29.155,5.972 29.155,7.565 29.718,8.128 36.322,8.128 42.037,13.843 42.037,16.891
SW3: C21.1 R23.2 S3.3 S3.4 U3.1 | length 26.9
  Top Layer w0.5: S3.3 34.151,3.482 R23.2 ; 45.849,17.528 U3.1
  Top Layer w0.6: R23.2 38.35,5.965 40.005,7.62 ; C21.1 40.108,7.517 40.005,7.62 ; 45.849,17.528 43.434,15.113 43.434,9.241 41.813,7.62 40.005,7.62
SW4: C22.1 R24.2 S4.3 S4.4 U3.2 | length 25.4
  Top Layer w0.5: v1(48.514,19.431) 48.514,19.296 48.807,19.003 U3.2
  Top Layer w1: S4.3 44.828,3.05 45.078,3.3 45.078,3.55 45.11,3.583 C22.1 47.117,5.971 ; v1(47.117,7.62) 47.117,5.971 ; R24.2 47.117,5.971
  Bottom Layer w0.6: v1(47.117,7.62) 48.641,9.144 48.641,17.931 48.514,18.058 v1(48.514,19.431)
SW5: C24.1 R25.2 S5.3 S5.4 U3.6 | length 27.3
  Top Layer w0.5: U3.6 52.007,18.987 v1(52.832,19.812)
  Top Layer w1: S5.3 55.686,3.05 55.936,3.3 55.936,3.55 56.033,3.646 R25.2 ; v1(56.007,7.493) 56.007,5.997 R25.2 ; C24.1 R25.2
  Bottom Layer w0.6: v1(52.832,19.812) 56.007,16.637 v1(56.007,7.493)
TX: R27.2 U3.30 | length 15.4
  Top Layer w0.5: 40.642,20.449 U3.30
  Top Layer w0.6: R27.2 36.41,13.077 36.56,13.227 R27.2@36.722,13.227 ; 37.23,13.1 39.497,15.367 39.497,19.304 40.642,20.449
USB_DN: J2.A7 J2.B7 R18.1 | length 7.7
  Top Layer w0.3: J2.B7 7.672,15.738 7.43,15.496 7.43,14.988 7.68,14.738 J2.A7 10.093,14.738 11.651,13.181 11.943,13.181 12.243,12.881 R18.1
USB_DP: J2.A6 J2.B6 R17.1 | length 9.7
  Top Layer w0.3: J2.B6 9.577,14.238 10.599,13.217 10.599,12.836 v1(10.732,12.702) ; J2.A6 v1@10.605,15.238 ; v1@10.609,15.238 11.248,14.6 R17.1
  Bottom Layer w0.6: v1(10.605,15.496) 10.542,15.433 10.542,13.802 10.692,13.652 10.692,12.743 v1(10.732,12.702)
USBD_N: D2.1 R18.2 U1.2 | length 13.6
  Top Layer w0.381: R18.2 13.943,12.581 R18.2@14.203,12.321 ; 19.736,12.321 19.746,12.332 20.159,12.332 D2.1 D2.1@20.519,12.692 ; U1.2@26.114,13.464 U1.2
  Top Layer w0.6: R18.2@14.203,12.321 19.736,12.321 ; D2.1 20.516,12.594 21.717,12.594 22.588,13.464 U1.2@26.114,13.464
USBD_P: D2.2 R17.2 U1.1 | length 13.7
  Top Layer w0.3: R17.2 13.943,14.688 R17.2@14.243,14.988 ; D2.2@19.821,14.988 D2.2@20.268,14.541 ; U1.1@26.108,14.734 U1.1
  Top Layer w0.6: R17.2@14.243,14.988 D2.2@19.821,14.988 ; D2.2 20.661,14.734 U1.1@26.693,14.734
XMI: C2.2 R1.2 U3.8 Y1.3 | length 6.9
  Top Layer w0.5: U3.8 53.608,15.254 R1.2@54.255,14.607
  Top Layer w1: Y1.3 54.554,14.157 54.255,14.457 54.255,14.607 54.554,14.607 C2.2
XMO: C1.2 R1.1 U3.7 Y1.1 | length 9.9
  Top Layer w0.5: R1.1 52.3,14.857 52.82,15.377 U3.7
  Top Layer w1: Y1.1 52.204,10.836 51.079,10.836 50.483,11.432 50.483,14.138 50.953,14.607 R1.1
pads on no net: C11.0 J2. J2.A8 J2.B8 LED1.0 M1.S M2.S M3.S M4.S NRF1.8 Q2.0 Q3.0 U1.4 U4.S1 U4.S2 U4.S3 U4.S4 U6.0

## Polygon pours and split planes (outlines as drawn)
GND on Bottom Layer "GND_L02_P000" (solid, pour order 0): 0.381,46.736 13.462,59.817 62.484,59.817 75.311,46.99 75.311,13.716 61.722,0.127 14.351,0.127 0.381,14.097
GND on Top Layer "GND_L01_P001" (solid, pour order 1): 0.381,46.736 13.462,59.817 62.484,59.817 75.311,46.99 75.311,13.716 61.722,0.127 14.351,0.127 0.381,14.097

## Keep-outs
Keep-Out Layer:
  lines w0.5: 70.944,-0.082 4.806,-0.124 cw(c4.806,4.811) -0.129,4.811 -0.017,55.936 cw(c4.049,55.936) 4.049,60.002 71.502,60.002 cw(c71.502,55.538) 75.966,55.538 ; 70.944,0.045 ccw(c70.944,5.101) 76,5.101 ; 76.093,55.538 76.127,5.101

## Other copper
Top Layer:
  rectangle net NetC5_2: 11.24,34.419 18.225,45.341
  region net NetC7_1: 17.717,22.989 18.225,23.497 18.225,24.64 17.717,25.148 15.304,25.148 14.669,24.513 14.669,23.116 14.669,22.989
Bottom Layer:
  rectangle net NetC7_1: 14.859,20.066 31.242,26.797
  pour cut-out: 20.32,54.356 20.32,39.37 4.826,39.37 4.826,54.356
  region: 263 vertices and 2 holes, not listed, extent 5.842,40.157 19.253,53.569
  region net NetC4_1: 30.353,31.242 5.969,31.242 5.969,37.973 24.638,37.973 30.734,31.877
  region net NetC7_1: 17.717,22.989 18.225,23.497 18.225,24.64 17.717,25.148 15.304,25.148 14.669,24.513 14.669,23.116 14.669,22.989

## Silkscreen, mask and mechanical layers (free items; w line width, h text height)
Bottom Solder:
  region: 263 vertices and 2 holes, not listed, extent 5.842,40.157 19.253,53.569

## Text inside footprints (layer, text, board x,y; h text height)
P2: Top Overlay "1" at 62.865,57.404 h1.2; Top Overlay "2" at 62.865,53.467 h1.2; Top Overlay "5" at 53.467,57.15 h1.2; Top Overlay "6" at 53.213,53.467 h1.2
P3: Top Overlay "10" at 48.387,57.15 h1.2; Top Overlay "9" at 48.641,53.594 h1.2; Top Overlay "1" at 34.29,53.721 h1.2; Top Overlay "2" at 34.163,56.896 h1.2
U3: Top Overlay "*" at 46.917,16.698 h1.2 r90; Mechanical 13 "*" at 46.917,16.698 h1.2 r90